# Altium PCB NEpic.PcbDoc (part 5 of 5)
Units mil, origin at the board's own origin, x right, y up, seen from the top; angles counter-clockwise.
Board outline 1660 x 1990 mil, 4 copper layers (Top Layer, GND, VCC, Bottom Layer); 30 components, 61 nets, 194 pads, 84 vias.
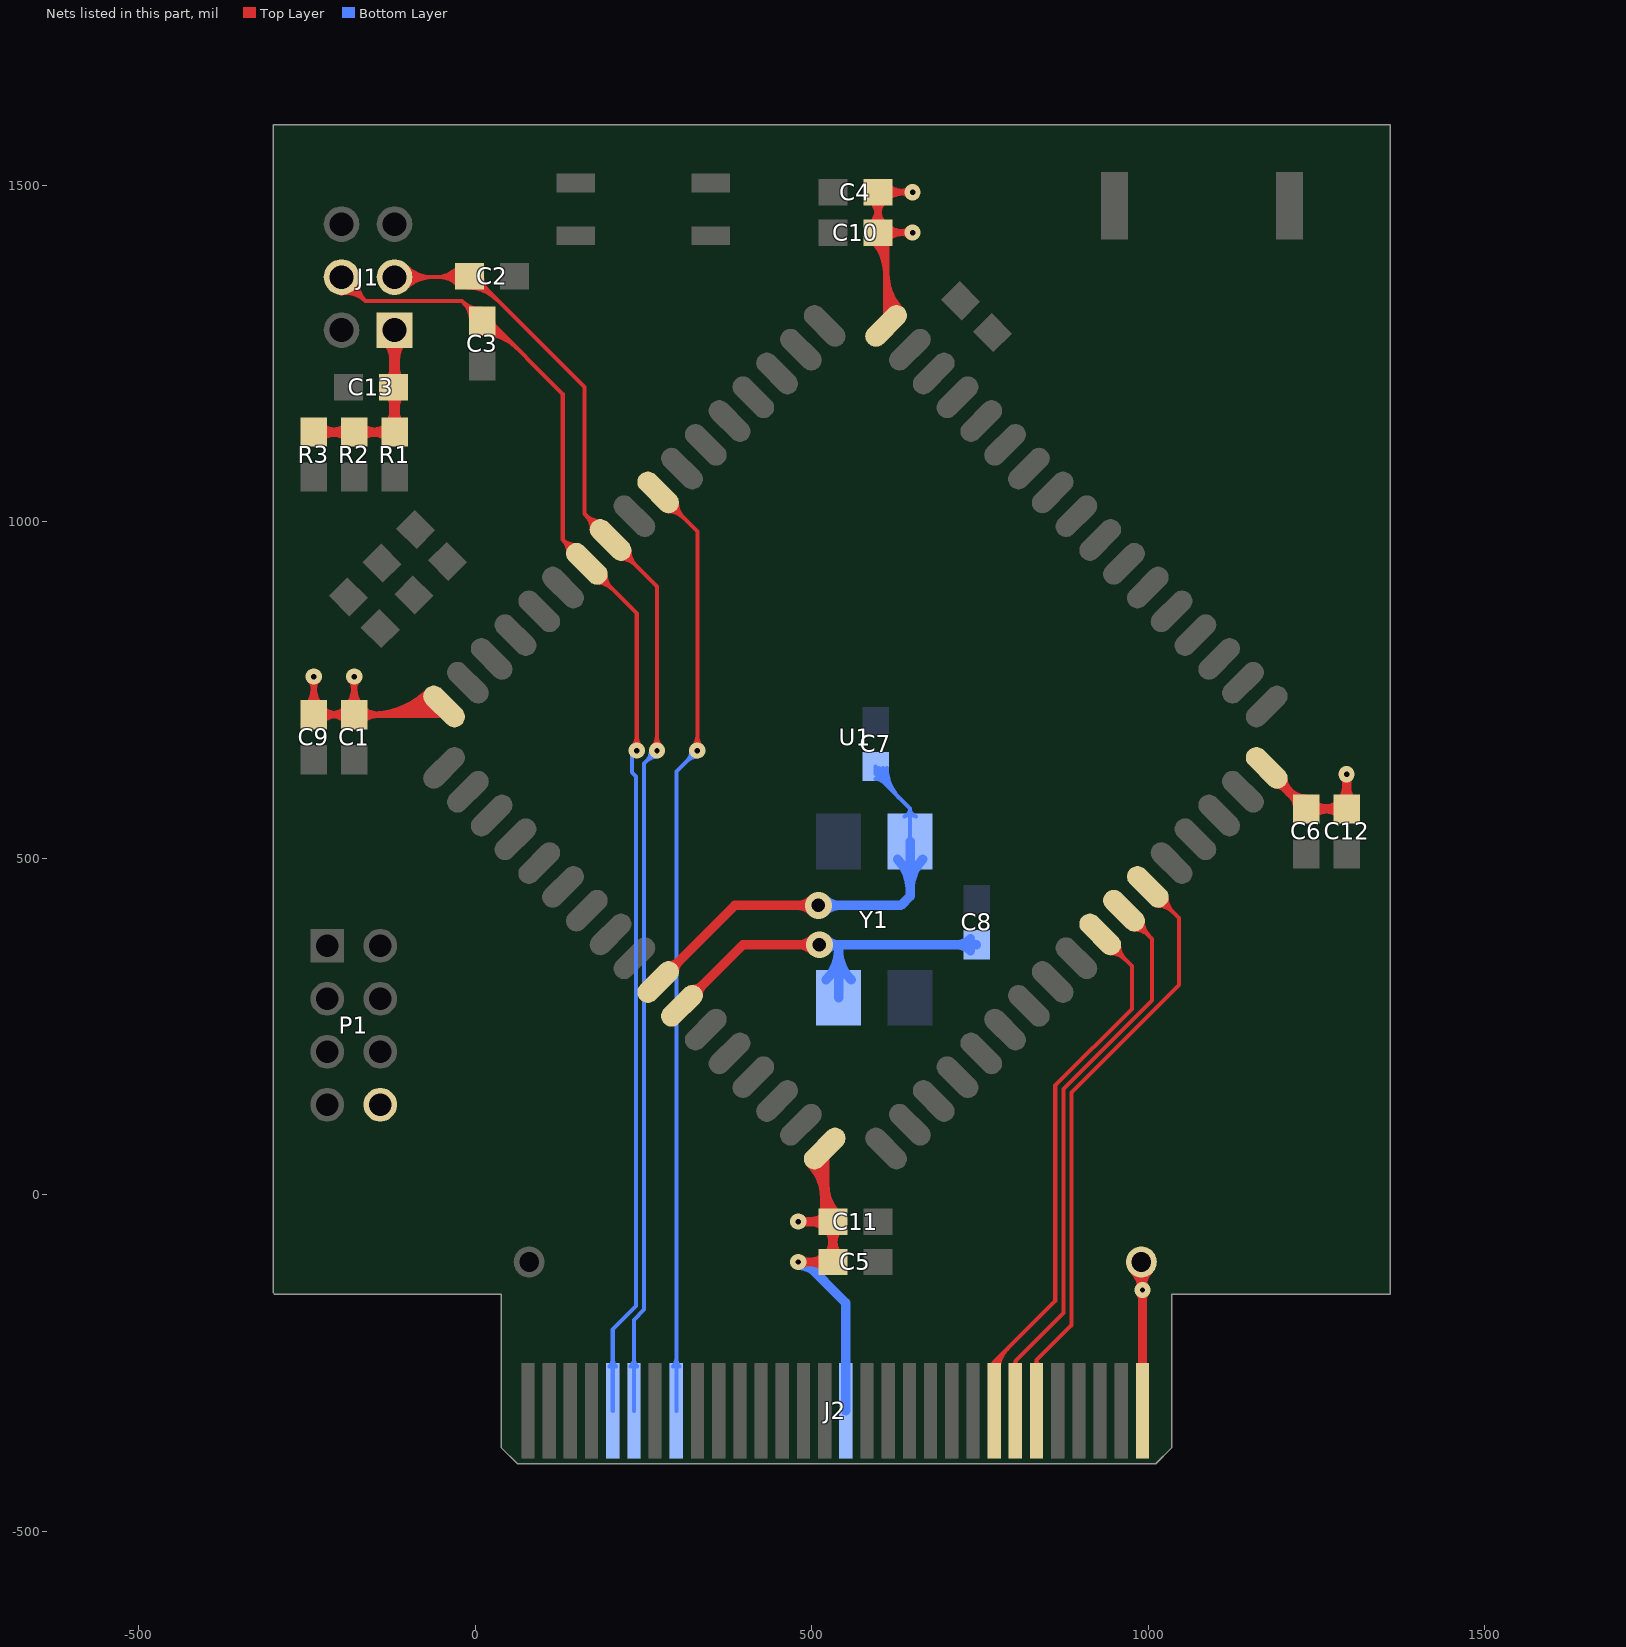
[diagram p7: the nets of this part, all layers, seen from the top]

## Via types
v1: diameter 24, hole 8, Top Layer to Bottom Layer, tented both sides, 78 vias
v2: diameter 150, hole 126, Top Layer to Bottom Layer, 4 vias
v3: diameter 40, hole 20, Top Layer to Bottom Layer, tented both sides, 2 vias

## Nets (pads, with @x,y where several pads share a name; then routed paths per layer and width w, separated by ;. In a path a pad name is that pad's centre, name@x,y a point inside that pad or via, vN(x,y) a via of type N, cw(c..) or ccw(c..) an arc to the next point about the centre after c; other vN are vias at no path point) (continued)
UART0TX: J2.45 U1.59 | length 2074.7
  Top Layer w6: U1.59@271.86,1043.85 330,985.71 v1(330,660) ; U1.59@287.17,1015.79 cw(c287.17,985.02) 308.93,1006.78 ; U1.59@287.17,1015.79 cw(c287.17,985.02) 308.93,1006.78 ; U1.59@287.17,1015.79 cw(c287.17,985.02) 308.93,1006.78 ; U1.59@287.17,1015.79 cw(c287.17,985.02) 308.93,1006.78 ; U1.59@287.17,1021.79 cw(c287.17,1005.5) 298.69,1017.02 ; U1.59@287.17,1021.79 cw(c287.17,1005.5) 298.69,1017.02 ; U1.59@287.17,1021.79 cw(c287.17,1005.5) 298.69,1017.02 ; U1.59@287.17,1021.79 cw(c287.17,1005.5) 298.69,1017.02 ; U1.59@293.92,1028.54 ccw(c310.21,1028.54) 298.69,1017.02 ; U1.59@293.92,1028.54 ccw(c310.21,1028.54) 298.69,1017.02 ; U1.59@293.92,1028.54 ccw(c310.21,1028.54) 298.69,1017.02 ; U1.59@293.92,1028.54 ccw(c310.21,1028.54) 298.69,1017.02 ; U1.59@299.92,1028.54 ccw(c330.69,1028.54) 308.93,1006.78 ; U1.59@299.92,1028.54 ccw(c330.69,1028.54) 308.93,1006.78 ; U1.59@299.92,1028.54 ccw(c330.69,1028.54) 308.93,1006.78 ; U1.59@299.92,1028.54 ccw(c330.69,1028.54) 308.93,1006.78 ; v1@323.64,666.36 ccw(c308.27,681.73) 330,681.73 ; v1@323.64,666.36 ccw(c308.27,681.73) 330,681.73 ; v1@323.64,666.36 ccw(c308.27,681.73) 330,681.73 ; v1@323.64,666.36 ccw(c308.27,681.73) 330,681.73 ; 330,681.73 ccw(c351.73,681.73) v1@336.36,666.36 ; 330,681.73 ccw(c351.73,681.73) v1@336.36,666.36 ; 330,681.73 ccw(c351.73,681.73) v1@336.36,666.36 ; 330,681.73 ccw(c351.73,681.73) v1@336.36,666.36
  Bottom Layer w6: J2.45@298.78,-321.26 298.78,628.78 v1(330,660) ; J2.45@293.94,-255.4 ccw(c282.26,-243.72) 298.78,-243.72 ; J2.45@293.94,-255.4 ccw(c282.26,-243.72) 298.78,-243.72 ; J2.45@293.94,-255.4 ccw(c282.26,-243.72) 298.78,-243.72 ; J2.45@293.94,-255.4 ccw(c282.26,-243.72) 298.78,-243.72 ; 298.78,-243.72 ccw(c315.3,-243.72) J2.45@303.62,-255.4 ; 298.78,-243.72 ccw(c315.3,-243.72) J2.45@303.62,-255.4 ; 298.78,-243.72 ccw(c315.3,-243.72) J2.45@303.62,-255.4 ; 298.78,-243.72 ccw(c315.3,-243.72) J2.45@303.62,-255.4 ; 314.64,644.64 cw(c330,629.27) v1@330,651 ; 314.64,644.64 ccw(c299.27,660) v1@321,660 ; 314.64,644.64 cw(c330,629.27) v1@330,651 ; 314.64,644.64 ccw(c299.27,660) v1@321,660 ; 314.64,644.64 cw(c330,629.27) v1@330,651 ; 314.64,644.64 ccw(c299.27,660) v1@321,660 ; 314.64,644.64 ccw(c299.27,660) v1@321,660 ; 314.64,644.64 cw(c330,629.27) v1@330,651
UART1RX: C3.2 J1.4 J2.51 U1.62 | length 4263.5
  Top Layer w6: J1.4@-198.74,1338.74 J1.4@-198.74,1363.74 -163.24,1328.24 ; J1.4@-196.47,1346.39 cw(c-192.93,1319.3) -173.62,1338.62 cw(c-154.3,1357.93) J1.4@-181.39,1361.47 ; J1.4@-195.7,1340.44 cw(c-190.94,1304.06) -165,1330 cw(c-139.06,1355.94) J1.4@-175.44,1360.7 ; v1(240,660) 240,863.58 U1.62@165.79,937.79 130,973.58 ; J1.4@-197.16,1346.31 cw(c-194.35,1315.26) -172.31,1337.31 ; J1.4@-197.16,1346.31 cw(c-194.35,1315.26) -172.31,1337.31 ; J1.4@-197.16,1346.31 cw(c-194.35,1315.26) -172.31,1337.31 ; J1.4@-196.62,1340.34 cw(c-192.85,1298.63) -163.24,1328.24 ; J1.4@-196.62,1340.34 cw(c-192.85,1298.63) -163.24,1328.24 ; J1.4@-196.62,1340.34 cw(c-192.85,1298.63) -163.24,1328.24 ; J1.4@-181.31,1362.16 ccw(c-150.26,1359.35) -172.31,1337.31 ; J1.4@-181.31,1362.16 ccw(c-150.26,1359.35) -172.31,1337.31 ; J1.4@-181.31,1362.16 ccw(c-150.26,1359.35) -172.31,1337.31 ; J1.4@-175.34,1361.62 ccw(c-133.63,1357.85) -163.24,1328.24 ; J1.4@-175.34,1361.62 ccw(c-133.63,1357.85) -163.24,1328.24 ; J1.4@-175.34,1361.62 ccw(c-133.63,1357.85) -163.24,1328.24 ; -163.24,1328.24 -134.7,1328.24 -19.78,1328.24 C3.2@10,1298.46 21.54,1298.46 130,1190 130,973.58 ; -18.79,1327.25 ccw(c6.05,1352.09) C3.2@8.73,1317.07 ; -18.79,1327.25 ccw(c6.05,1352.09) C3.2@8.73,1317.07 ; -18.79,1327.25 ccw(c6.05,1352.09) C3.2@8.73,1317.07 ; -18.79,1327.25 ccw(c6.05,1352.09) C3.2@8.73,1317.07 ; -17.09,1325.56 cw(c-42.21,1300.43) C3.2@-6.68,1300.43 ; -17.09,1325.56 cw(c-42.21,1300.43) C3.2@-6.68,1300.43 ; -17.09,1325.56 cw(c-42.21,1300.43) C3.2@-6.68,1300.43 ; -17.09,1325.56 cw(c-42.21,1300.43) C3.2@-6.68,1300.43 ; C3.2@-9.56,1318.03 ccw(c7.36,1334.95) C3.2@9.18,1311.09 ; C3.2@-9.56,1318.03 ccw(c7.36,1334.95) C3.2@9.18,1311.09 ; C3.2@-9.56,1318.03 ccw(c7.36,1334.95) C3.2@9.18,1311.09 ; C3.2@-9.56,1318.03 ccw(c7.36,1334.95) C3.2@9.18,1311.09 ; C3.2@-6.85,1315.31 cw(c-21.73,1300.43) C3.2@-0.68,1300.43 ; C3.2@-6.85,1315.31 cw(c-21.73,1300.43) C3.2@-0.68,1300.43 ; C3.2@-6.85,1315.31 cw(c-21.73,1300.43) C3.2@-0.68,1300.43 ; C3.2@-6.85,1315.31 cw(c-21.73,1300.43) C3.2@-0.68,1300.43 ; C3.2@10,1279.81 cw(c10,1206.93) 61.54,1258.46 ; C3.2@10,1279.81 cw(c10,1206.93) 61.54,1258.46 ; C3.2@10,1279.81 cw(c10,1206.93) 61.54,1258.46 ; C3.2@10,1279.81 cw(c10,1206.93) 61.54,1258.46 ; C3.2@10,1285.81 cw(c10,1227.41) 51.29,1268.71 ; C3.2@10,1285.81 cw(c10,1227.41) 51.29,1268.71 ; C3.2@10,1285.81 cw(c10,1227.41) 51.29,1268.71 ; C3.2@10,1285.81 cw(c10,1227.41) 51.29,1268.71 ; C3.2@10,1291.81 cw(c10,1247.9) 41.05,1278.95 ; C3.2@10,1291.81 cw(c10,1247.9) 41.05,1278.95 ; C3.2@10,1291.81 cw(c10,1247.9) 41.05,1278.95 ; C3.2@10,1291.81 cw(c10,1247.9) 41.05,1278.95 ; C3.2@10,1297.81 cw(c10,1268.38) 30.81,1289.19 ; C3.2@10,1297.81 cw(c10,1268.38) 30.81,1289.19 ; C3.2@10,1297.81 cw(c10,1268.38) 30.81,1289.19 ; C3.2@10,1297.81 cw(c10,1268.38) 30.81,1289.19 ; C3.2@26.69,1296.5 ccw(c34.36,1296.5) C3.2@28.93,1291.07 ; C3.2@26.69,1296.5 ccw(c34.36,1296.5) C3.2@28.93,1291.07 ; C3.2@26.69,1296.5 ccw(c34.36,1296.5) C3.2@28.93,1291.07 ; C3.2@26.69,1296.5 ccw(c34.36,1296.5) C3.2@28.93,1291.07 ; 130,973.58 cw(c111.25,954.82) U1.62@137.74,953.66 ; 130,973.58 ccw(c148.75,992.33) U1.62@149.92,965.83 ; 130,973.58 cw(c111.25,954.82) U1.62@137.74,953.66 ; 130,973.58 ccw(c148.75,992.33) U1.62@149.92,965.83 ; 130,973.58 cw(c111.25,954.82) U1.62@137.74,953.66 ; 130,973.58 ccw(c148.75,992.33) U1.62@149.92,965.83 ; 130,973.58 ccw(c148.75,992.33) U1.62@149.92,965.83 ; 130,973.58 cw(c111.25,954.82) U1.62@137.74,953.66 ; U1.62@181.1,909.73 cw(c181.1,878.95) 202.86,900.71 ; U1.62@181.1,909.73 cw(c181.1,878.95) 202.86,900.71 ; U1.62@181.1,909.73 cw(c181.1,878.95) 202.86,900.71 ; U1.62@181.1,909.73 cw(c181.1,878.95) 202.86,900.71 ; U1.62@181.1,915.73 cw(c181.1,899.44) 192.62,910.96 ; U1.62@181.1,915.73 cw(c181.1,899.44) 192.62,910.96 ; U1.62@181.1,915.73 cw(c181.1,899.44) 192.62,910.96 ; U1.62@181.1,915.73 cw(c181.1,899.44) 192.62,910.96 ; U1.62@187.85,922.48 ccw(c204.14,922.48) 192.62,910.96 ; U1.62@187.85,922.48 ccw(c204.14,922.48) 192.62,910.96 ; U1.62@187.85,922.48 ccw(c204.14,922.48) 192.62,910.96 ; U1.62@187.85,922.48 ccw(c204.14,922.48) 192.62,910.96 ; U1.62@193.85,922.48 ccw(c224.63,922.48) 202.86,900.71 ; U1.62@193.85,922.48 ccw(c224.63,922.48) 202.86,900.71 ; U1.62@193.85,922.48 ccw(c224.63,922.48) 202.86,900.71 ; U1.62@193.85,922.48 ccw(c224.63,922.48) 202.86,900.71 ; v1@233.64,666.36 ccw(c218.27,681.73) 240,681.73 ; v1@233.64,666.36 ccw(c218.27,681.73) 240,681.73 ; v1@233.64,666.36 ccw(c218.27,681.73) 240,681.73 ; v1@233.64,666.36 ccw(c218.27,681.73) 240,681.73 ; 240,681.73 ccw(c261.73,681.73) v1@246.36,666.36 ; 240,681.73 ccw(c261.73,681.73) v1@246.36,666.36 ; 240,681.73 ccw(c261.73,681.73) v1@246.36,666.36 ; 240,681.73 ccw(c261.73,681.73) v1@246.36,666.36
  Bottom Layer w6: J2.51@204.29,-321.26 204.29,-200.42 239,-165.71 239,621.91 233,627.91 233,653 v1(240,660) ; J2.51@199.45,-255.4 ccw(c187.77,-243.72) 204.29,-243.72 ; J2.51@199.45,-255.4 ccw(c187.77,-243.72) 204.29,-243.72 ; J2.51@199.45,-255.4 ccw(c187.77,-243.72) 204.29,-243.72 ; J2.51@199.45,-255.4 ccw(c187.77,-243.72) 204.29,-243.72 ; 204.29,-243.72 ccw(c220.81,-243.72) J2.51@209.13,-255.4 ; 204.29,-243.72 ccw(c220.81,-243.72) J2.51@209.13,-255.4 ; 204.29,-243.72 ccw(c220.81,-243.72) J2.51@209.13,-255.4 ; 204.29,-243.72 ccw(c220.81,-243.72) J2.51@209.13,-255.4
UART1TX: C2.2 J1.3 J2.49 U1.61 | length 4581.3
  Top Layer w6: J1.3@-120,1363.74 -1.21,1363.74 162.15,1200.38 162.15,1012.13 U1.61@201.15,973.14 270,904.29 v1(270,660) ; -53.76,1363.74 ccw(c-53.76,1408.32) C2.2@-22.23,1376.8 ; -47.67,1363.74 cw(c-47.67,1327.76) C2.2@-22.23,1353.2 ; -39.27,1363.74 ccw(c-39.27,1393.84) C2.2@-17.99,1372.56 ; -33.19,1363.74 cw(c-33.19,1342.25) C2.2@-17.99,1357.44 ; C2.2@-6.5,1348.32 cw(c-6.5,1298.31) 28.86,1333.67 ; C2.2@-6.5,1354.31 cw(c-6.5,1318.8) 18.62,1343.91 ; C2.2@10.19,1365 ccw(c40.75,1365) 19.14,1343.39 ; J1.3@-111.87,1355.61 cw(c-92.24,1335.98) -92.24,1363.74 ; J1.3@-111.87,1355.61 cw(c-92.24,1335.98) -92.24,1363.74 ; J1.3@-111.87,1355.61 cw(c-92.24,1335.98) -92.24,1363.74 ; J1.3@-111.87,1355.61 cw(c-92.24,1335.98) -92.24,1363.74 ; J1.3@-111.87,1371.87 ccw(c-92.24,1391.5) -92.24,1363.74 ; J1.3@-111.87,1371.87 ccw(c-92.24,1391.5) -92.24,1363.74 ; J1.3@-111.87,1371.87 ccw(c-92.24,1391.5) -92.24,1363.74 ; J1.3@-111.87,1371.87 ccw(c-92.24,1391.5) -92.24,1363.74 ; J1.3@-107.63,1351.37 cw(c-77.75,1321.49) -77.75,1363.74 ; J1.3@-107.63,1351.37 cw(c-77.75,1321.49) -77.75,1363.74 ; J1.3@-107.63,1351.37 cw(c-77.75,1321.49) -77.75,1363.74 ; J1.3@-107.63,1351.37 cw(c-77.75,1321.49) -77.75,1363.74 ; J1.3@-107.63,1376.11 ccw(c-77.75,1405.99) -77.75,1363.74 ; J1.3@-107.63,1376.11 ccw(c-77.75,1405.99) -77.75,1363.74 ; J1.3@-107.63,1376.11 ccw(c-77.75,1405.99) -77.75,1363.74 ; J1.3@-107.63,1376.11 ccw(c-77.75,1405.99) -77.75,1363.74 ; J1.3@-103.38,1347.12 cw(c-63.27,1307.01) -63.27,1363.74 ; J1.3@-103.38,1347.12 cw(c-63.27,1307.01) -63.27,1363.74 ; J1.3@-103.38,1347.12 cw(c-63.27,1307.01) -63.27,1363.74 ; J1.3@-103.38,1347.12 cw(c-63.27,1307.01) -63.27,1363.74 ; J1.3@-103.38,1380.36 ccw(c-63.27,1420.47) -63.27,1363.74 ; J1.3@-103.38,1380.36 ccw(c-63.27,1420.47) -63.27,1363.74 ; J1.3@-103.38,1380.36 ccw(c-63.27,1420.47) -63.27,1363.74 ; J1.3@-103.38,1380.36 ccw(c-63.27,1420.47) -63.27,1363.74 ; -58.76,1363.74 ccw(c-58.76,1408.32) C2.2@-27.23,1376.8 ; -58.76,1363.74 ccw(c-58.76,1408.32) C2.2@-27.23,1376.8 ; -58.76,1363.74 ccw(c-58.76,1408.32) C2.2@-27.23,1376.8 ; -52.67,1363.74 cw(c-52.67,1327.76) C2.2@-27.23,1353.2 ; -52.67,1363.74 cw(c-52.67,1327.76) C2.2@-27.23,1353.2 ; -52.67,1363.74 cw(c-52.67,1327.76) C2.2@-27.23,1353.2 ; -44.27,1363.74 ccw(c-44.27,1393.84) C2.2@-22.99,1372.56 ; -44.27,1363.74 ccw(c-44.27,1393.84) C2.2@-22.99,1372.56 ; -44.27,1363.74 ccw(c-44.27,1393.84) C2.2@-22.99,1372.56 ; -38.19,1363.74 cw(c-38.19,1342.25) C2.2@-22.99,1357.44 ; -38.19,1363.74 cw(c-38.19,1342.25) C2.2@-22.99,1357.44 ; -38.19,1363.74 cw(c-38.19,1342.25) C2.2@-22.99,1357.44 ; C2.2@-11.5,1348.32 cw(c-11.5,1286.24) 32.4,1330.13 ; C2.2@-11.5,1348.32 cw(c-11.5,1286.24) 32.4,1330.13 ; C2.2@-11.5,1348.32 cw(c-11.5,1286.24) 32.4,1330.13 ; C2.2@-11.5,1354.31 cw(c-11.5,1306.73) 22.15,1340.38 ; C2.2@-11.5,1354.31 cw(c-11.5,1306.73) 22.15,1340.38 ; C2.2@-11.5,1354.31 cw(c-11.5,1306.73) 22.15,1340.38 ; C2.2@-11.5,1360.31 cw(c-11.5,1327.21) C2.2@11.91,1350.62 ; C2.2@-11.5,1360.31 cw(c-11.5,1327.21) C2.2@11.91,1350.62 ; C2.2@-11.5,1360.31 cw(c-11.5,1327.21) C2.2@11.91,1350.62 ; C2.2@5.19,1365 ccw(c23.68,1365) C2.2@10.61,1351.93 ; C2.2@5.19,1365 ccw(c23.68,1365) C2.2@10.61,1351.93 ; C2.2@5.19,1365 ccw(c23.68,1365) C2.2@10.61,1351.93 ; 164.07,1010.22 cw(c142.31,988.45) U1.61@173.09,988.45 ; 164.07,1010.22 ccw(c185.83,1031.98) U1.61@185.83,1001.2 ; 164.07,1010.22 cw(c142.31,988.45) U1.61@173.09,988.45 ; 164.07,1010.22 ccw(c185.83,1031.98) U1.61@185.83,1001.2 ; 164.07,1010.22 ccw(c185.83,1031.98) U1.61@185.83,1001.2 ; 164.07,1010.22 cw(c142.31,988.45) U1.61@173.09,988.45 ; 164.07,1010.22 ccw(c185.83,1031.98) U1.61@185.83,1001.2 ; 164.07,1010.22 cw(c142.31,988.45) U1.61@173.09,988.45 ; 174.32,999.97 cw(c162.8,988.45) U1.61@179.09,988.45 ; 174.32,999.97 ccw(c185.83,1011.49) U1.61@185.83,995.2 ; 174.32,999.97 cw(c162.8,988.45) U1.61@179.09,988.45 ; 174.32,999.97 ccw(c185.83,1011.49) U1.61@185.83,995.2 ; 174.32,999.97 ccw(c185.83,1011.49) U1.61@185.83,995.2 ; 174.32,999.97 cw(c162.8,988.45) U1.61@179.09,988.45 ; 174.32,999.97 ccw(c185.83,1011.49) U1.61@185.83,995.2 ; 174.32,999.97 cw(c162.8,988.45) U1.61@179.09,988.45 ; U1.61@216.46,945.08 cw(c216.46,914.31) 238.22,936.07 ; U1.61@216.46,945.08 cw(c216.46,914.31) 238.22,936.07 ; U1.61@216.46,945.08 cw(c216.46,914.31) 238.22,936.07 ; U1.61@216.46,945.08 cw(c216.46,914.31) 238.22,936.07 ; U1.61@216.46,951.08 cw(c216.46,934.79) 227.98,946.31 ; U1.61@216.46,951.08 cw(c216.46,934.79) 227.98,946.31 ; U1.61@216.46,951.08 cw(c216.46,934.79) 227.98,946.31 ; U1.61@216.46,951.08 cw(c216.46,934.79) 227.98,946.31 ; U1.61@223.21,957.83 ccw(c239.5,957.83) 227.98,946.31 ; U1.61@223.21,957.83 ccw(c239.5,957.83) 227.98,946.31 ; U1.61@223.21,957.83 ccw(c239.5,957.83) 227.98,946.31 ; U1.61@223.21,957.83 ccw(c239.5,957.83) 227.98,946.31 ; U1.61@229.21,957.83 ccw(c259.98,957.83) 238.22,936.07 ; U1.61@229.21,957.83 ccw(c259.98,957.83) 238.22,936.07 ; U1.61@229.21,957.83 ccw(c259.98,957.83) 238.22,936.07 ; U1.61@229.21,957.83 ccw(c259.98,957.83) 238.22,936.07 ; v1@263.64,666.36 ccw(c248.27,681.73) 270,681.73 ; v1@263.64,666.36 ccw(c248.27,681.73) 270,681.73 ; v1@263.64,666.36 ccw(c248.27,681.73) 270,681.73 ; v1@263.64,666.36 ccw(c248.27,681.73) 270,681.73 ; 270,681.73 ccw(c291.73,681.73) v1@276.36,666.36 ; 270,681.73 ccw(c291.73,681.73) v1@276.36,666.36 ; 270,681.73 ccw(c291.73,681.73) v1@276.36,666.36 ; 270,681.73 ccw(c291.73,681.73) v1@276.36,666.36
  Bottom Layer w6: J2.49@235.79,-321.26 235.79,-185.9 251,-170.69 251,641 v1(270,660) ; J2.49@230.95,-255.4 ccw(c219.27,-243.72) 235.79,-243.72 ; J2.49@230.95,-255.4 ccw(c219.27,-243.72) 235.79,-243.72 ; J2.49@230.95,-255.4 ccw(c219.27,-243.72) 235.79,-243.72 ; J2.49@230.95,-255.4 ccw(c219.27,-243.72) 235.79,-243.72 ; 235.79,-243.72 ccw(c252.31,-243.72) J2.49@240.63,-255.4 ; 235.79,-243.72 ccw(c252.31,-243.72) J2.49@240.63,-255.4 ; 235.79,-243.72 ccw(c252.31,-243.72) J2.49@240.63,-255.4 ; 235.79,-243.72 ccw(c252.31,-243.72) J2.49@240.63,-255.4 ; 254.64,644.64 cw(c270,629.27) v1@270,651 ; 254.64,644.64 ccw(c239.27,660) v1@261,660 ; 254.64,644.64 cw(c270,629.27) v1@270,651 ; 254.64,644.64 ccw(c239.27,660) v1@261,660 ; 254.64,644.64 ccw(c239.27,660) v1@261,660 ; 254.64,644.64 cw(c270,629.27) v1@270,651 ; 254.64,644.64 ccw(c239.27,660) v1@261,660 ; 254.64,644.64 cw(c270,629.27) v1@270,651
VCC: C1.2 C4.2 C5.2 C6.2 C9.2 C10.2 C11.2 C12.2 C13.2 J1.1 J2.2 J2.29 P1.8 pad.0@990,-100 R1.1 R2.1 R3.1 U1.17 U1.34 U1.51 U1.68 | length 10953.3
  Top Layer w6: U1.34@1176.34,632.12 U1.34@1176.34,634.34
  Top Layer w10: v1(-240,770) C9.2@-240,713.46 -58.53,713.46 ; C1.2@-180,713.46 v1(-180,770) ; U1.68@-46.34,725.66 -58.53,713.46 ; C11.2@519.34,-27.81 C11.2@531.54,-40 ; U1.51@610.66,1291.34 610.66,1417.81 C10.2@598.46,1430 ; v1(650,1430) C10.2@598.46,1430 ; v1(650,1490) C4.2@598.46,1490 C10.2@598.46,1430 ; C9.2@-250.38,725.82 ccw(c-275.45,750.89) -240,750.89 ; C9.2@-250.38,725.82 ccw(c-275.45,750.89) -240,750.89 ; C9.2@-250.38,725.82 ccw(c-275.45,750.89) -240,750.89 ; C9.2@-250.38,725.82 ccw(c-275.45,750.89) -240,750.89 ; v1@-244.95,765.05 cw(c-256.9,753.1) -240,753.1 ; v1@-244.95,765.05 cw(c-256.9,753.1) -240,753.1 ; v1@-244.95,765.05 cw(c-256.9,753.1) -240,753.1 ; v1@-244.95,765.05 cw(c-256.9,753.1) -240,753.1 ; -240,750.89 ccw(c-204.55,750.89) C9.2@-229.62,725.82 ; -240,750.89 ccw(c-204.55,750.89) C9.2@-229.62,725.82 ; -240,750.89 ccw(c-204.55,750.89) C9.2@-229.62,725.82 ; -240,750.89 ccw(c-204.55,750.89) C9.2@-229.62,725.82 ; -240,753.1 cw(c-223.1,753.1) v1@-235.05,765.05 ; -240,753.1 cw(c-223.1,753.1) v1@-235.05,765.05 ; -240,753.1 cw(c-223.1,753.1) v1@-235.05,765.05 ; -240,753.1 cw(c-223.1,753.1) v1@-235.05,765.05 ; C9.2@-229.62,703.08 cw(c-204.55,678.01) -204.55,713.46 ; C9.2@-229.62,703.08 cw(c-204.55,678.01) -204.55,713.46 ; C9.2@-229.62,703.08 cw(c-204.55,678.01) -204.55,713.46 ; C9.2@-229.62,703.08 cw(c-204.55,678.01) -204.55,713.46 ; C9.2@-229.62,723.85 ccw(c-204.55,748.92) -204.55,713.46 ; C9.2@-229.62,723.85 ccw(c-204.55,748.92) -204.55,713.46 ; C9.2@-229.62,723.85 ccw(c-204.55,748.92) -204.55,713.46 ; C9.2@-229.62,723.85 ccw(c-204.55,748.92) -204.55,713.46 ; -215.45,713.46 cw(c-215.45,678.01) C1.2@-190.38,703.08 ; -215.45,713.46 ccw(c-215.45,748.92) C1.2@-190.38,723.85 ; -215.45,713.46 cw(c-215.45,678.01) C1.2@-190.38,703.08 ; -215.45,713.46 ccw(c-215.45,748.92) C1.2@-190.38,723.85 ; -215.45,713.46 ccw(c-215.45,748.92) C1.2@-190.38,723.85 ; -215.45,713.46 cw(c-215.45,678.01) C1.2@-190.38,703.08 ; -215.45,713.46 ccw(c-215.45,748.92) C1.2@-190.38,723.85 ; -215.45,713.46 cw(c-215.45,678.01) C1.2@-190.38,703.08 ; C1.2@-190.38,725.82 ccw(c-215.45,750.89) -180,750.89 ; C1.2@-190.38,725.82 ccw(c-215.45,750.89) -180,750.89 ; C1.2@-190.38,725.82 ccw(c-215.45,750.89) -180,750.89 ; C1.2@-190.38,725.82 ccw(c-215.45,750.89) -180,750.89 ; v1@-184.95,765.05 cw(c-196.9,753.1) -180,753.1 ; v1@-184.95,765.05 cw(c-196.9,753.1) -180,753.1 ; v1@-184.95,765.05 cw(c-196.9,753.1) -180,753.1 ; v1@-184.95,765.05 cw(c-196.9,753.1) -180,753.1 ; -180,750.89 ccw(c-144.55,750.89) C1.2@-169.62,725.82 ; -180,750.89 ccw(c-144.55,750.89) C1.2@-169.62,725.82 ; -180,750.89 ccw(c-144.55,750.89) C1.2@-169.62,725.82 ; -180,750.89 ccw(c-144.55,750.89) C1.2@-169.62,725.82 ; -180,753.1 cw(c-163.1,753.1) v1@-175.05,765.05 ; -180,753.1 cw(c-163.1,753.1) v1@-175.05,765.05 ; -180,753.1 cw(c-163.1,753.1) v1@-175.05,765.05 ; -180,753.1 cw(c-163.1,753.1) v1@-175.05,765.05 ; C1.2@-169.62,703.08 cw(c-144.55,678.01) -144.55,713.46 ; C1.2@-169.62,703.08 cw(c-144.55,678.01) -144.55,713.46 ; C1.2@-169.62,703.08 cw(c-144.55,678.01) -144.55,713.46 ; C1.2@-169.62,703.08 cw(c-144.55,678.01) -144.55,713.46 ; C1.2@-169.62,723.85 ccw(c-144.55,748.92) -144.55,713.46 ; C1.2@-169.62,723.85 ccw(c-144.55,748.92) -144.55,713.46 ; C1.2@-169.62,723.85 ccw(c-144.55,748.92) -144.55,713.46 ; C1.2@-169.62,723.85 ccw(c-144.55,748.92) -144.55,713.46 ; -154,713.46 ccw(c-154,833.31) U1.68@-69.25,748.57 ; -154,713.46 ccw(c-154,833.31) U1.68@-69.25,748.57 ; -154,713.46 ccw(c-154,833.31) U1.68@-69.25,748.57 ; -154,713.46 ccw(c-154,833.31) U1.68@-69.25,748.57 ; -129.86,713.46 ccw(c-129.86,809.17) U1.68@-62.18,741.5 ; -129.86,713.46 ccw(c-129.86,809.17) U1.68@-62.18,741.5 ; -129.86,713.46 ccw(c-129.86,809.17) U1.68@-62.18,741.5 ; -129.86,713.46 ccw(c-129.86,809.17) U1.68@-62.18,741.5 ; -105.71,713.46 ccw(c-105.71,785.03) U1.68@-55.11,734.43 ; -105.71,713.46 ccw(c-105.71,785.03) U1.68@-55.11,734.43 ; -105.71,713.46 ccw(c-105.71,785.03) U1.68@-55.11,734.43 ; -105.71,713.46 ccw(c-105.71,785.03) U1.68@-55.11,734.43 ; -81.57,713.46 ccw(c-81.57,760.89) U1.68@-48.04,727.35 ; -81.57,713.46 ccw(c-81.57,760.89) U1.68@-48.04,727.35 ; -81.57,713.46 ccw(c-81.57,760.89) U1.68@-48.04,727.35 ; -81.57,713.46 ccw(c-81.57,760.89) U1.68@-48.04,727.35 ; -58.53,713.47 cw(c-52.56,707.49) U1.68@-49.82,715.49 ; -58.53,713.47 ccw(c-64.51,719.44) U1.68@-56.51,722.18 ; -58.53,713.47 cw(c-52.56,707.49) U1.68@-49.82,715.49 ; -58.53,713.47 ccw(c-64.51,719.44) U1.68@-56.51,722.18 ; -58.53,713.47 ccw(c-64.51,719.44) U1.68@-56.51,722.18 ; -58.53,713.47 cw(c-52.56,707.49) U1.68@-49.82,715.49 ; -58.53,713.47 ccw(c-64.51,719.44) U1.68@-56.51,722.18 ; -58.53,713.47 cw(c-52.56,707.49) U1.68@-49.82,715.49 ; -57.43,713.46 ccw(c-57.43,736.74) U1.68@-40.97,720.28 ; -57.43,713.46 ccw(c-57.43,736.74) U1.68@-40.97,720.28 ; -57.43,713.46 ccw(c-57.43,736.74) U1.68@-40.97,720.28 ; -57.43,713.46 ccw(c-57.43,736.74) U1.68@-40.97,720.28 ; C10.2@588.08,1440.38 ccw(c563.01,1465.45) 598.46,1465.45 ; C10.2@588.08,1440.38 ccw(c563.01,1465.45) 598.46,1465.45 ; C10.2@588.08,1440.38 ccw(c563.01,1465.45) 598.46,1465.45 ; C10.2@588.08,1440.38 ccw(c563.01,1465.45) 598.46,1465.45 ; C4.2@588.08,1479.62 cw(c563.01,1454.55) 598.46,1454.55 ; C4.2@588.08,1479.62 cw(c563.01,1454.55) 598.46,1454.55 ; C4.2@588.08,1479.62 cw(c563.01,1454.55) 598.46,1454.55 ; C4.2@588.08,1479.62 cw(c563.01,1454.55) 598.46,1454.55 ; C10.2@590.05,1419.62 cw(c540.3,1369.87) 610.66,1369.87 ; C10.2@590.05,1419.62 cw(c540.3,1369.87) 610.66,1369.87 ; C10.2@590.05,1419.62 cw(c540.3,1369.87) 610.66,1369.87 ; C10.2@590.05,1419.62 cw(c540.3,1369.87) 610.66,1369.87 ; C10.2@597.12,1426.69 cw(c564.44,1394.01) 610.66,1394.01 ; C10.2@597.12,1426.69 cw(c564.44,1394.01) 610.66,1394.01 ; C10.2@597.12,1426.69 cw(c564.44,1394.01) 610.66,1394.01 ; C10.2@597.12,1426.69 cw(c564.44,1394.01) 610.66,1394.01 ; 598.46,1454.55 cw(c633.92,1454.55) C4.2@608.85,1479.62 ; 598.46,1454.55 cw(c633.92,1454.55) C4.2@608.85,1479.62 ; 598.46,1454.55 cw(c633.92,1454.55) C4.2@608.85,1479.62 ; 598.46,1454.55 cw(c633.92,1454.55) C4.2@608.85,1479.62 ; 598.46,1465.45 ccw(c633.92,1465.45) C10.2@608.85,1440.38 ; 598.46,1465.45 ccw(c633.92,1465.45) C10.2@608.85,1440.38 ; 598.46,1465.45 ccw(c633.92,1465.45) C10.2@608.85,1440.38 ; 598.46,1465.45 ccw(c633.92,1465.45) C10.2@608.85,1440.38 ; U1.51@610.66,1297.14 ccw(c616.45,1297.14) U1.51@612.35,1293.04 ; U1.51@610.66,1297.14 ccw(c616.45,1297.14) U1.51@612.35,1293.04 ; U1.51@610.66,1297.14 ccw(c616.45,1297.14) U1.51@612.35,1293.04 ; U1.51@610.66,1297.14 ccw(c616.45,1297.14) U1.51@612.35,1293.04 ; 610.66,1321.28 ccw(c640.6,1321.28) U1.51@619.43,1300.11 ; 610.66,1321.28 ccw(c640.6,1321.28) U1.51@619.43,1300.11 ; 610.66,1321.28 ccw(c640.6,1321.28) U1.51@619.43,1300.11 ; 610.66,1321.28 ccw(c640.6,1321.28) U1.51@619.43,1300.11 ; 610.66,1345.42 ccw(c664.74,1345.42) U1.51@626.5,1307.18 ; 610.66,1345.42 ccw(c664.74,1345.42) U1.51@626.5,1307.18 ; 610.66,1345.42 ccw(c664.74,1345.42) U1.51@626.5,1307.18 ; 610.66,1345.42 ccw(c664.74,1345.42) U1.51@626.5,1307.18 ; 610.66,1369.57 ccw(c688.88,1369.57) U1.51@633.57,1314.25 ; 610.66,1369.57 ccw(c688.88,1369.57) U1.51@633.57,1314.25 ; 610.66,1369.57 ccw(c688.88,1369.57) U1.51@633.57,1314.25 ; 610.66,1369.57 ccw(c688.88,1369.57) U1.51@633.57,1314.25 ; C10.2@610.82,1419.62 cw(c635.89,1394.55) 635.89,1430 ; C10.2@610.82,1419.62 cw(c635.89,1394.55) 635.89,1430 ; C10.2@610.82,1419.62 cw(c635.89,1394.55) 635.89,1430 ; C10.2@610.82,1419.62 cw(c635.89,1394.55) 635.89,1430 ; C10.2@610.82,1440.38 ccw(c635.89,1465.45) 635.89,1430 ; C10.2@610.82,1440.38 ccw(c635.89,1465.45) 635.89,1430 ; C10.2@610.82,1440.38 ccw(c635.89,1465.45) 635.89,1430 ; C10.2@610.82,1440.38 ccw(c635.89,1465.45) 635.89,1430 ; C4.2@610.82,1479.62 cw(c635.89,1454.55) 635.89,1490 ; C4.2@610.82,1479.62 cw(c635.89,1454.55) 635.89,1490 ; C4.2@610.82,1479.62 cw(c635.89,1454.55) 635.89,1490 ; C4.2@610.82,1479.62 cw(c635.89,1454.55) 635.89,1490 ; C4.2@610.82,1500.38 ccw(c635.89,1525.45) 635.89,1490 ; C4.2@610.82,1500.38 ccw(c635.89,1525.45) 635.89,1490 ; C4.2@610.82,1500.38 ccw(c635.89,1525.45) 635.89,1490 ; C4.2@610.82,1500.38 ccw(c635.89,1525.45) 635.89,1490 ; 633.1,1430 cw(c633.1,1413.1) v1@645.05,1425.05 ; 633.1,1430 ccw(c633.1,1446.9) v1@645.05,1434.95 ; 633.1,1430 cw(c633.1,1413.1) v1@645.05,1425.05 ; 633.1,1430 ccw(c633.1,1446.9) v1@645.05,1434.95 ; 633.1,1430 ccw(c633.1,1446.9) v1@645.05,1434.95 ; 633.1,1430 cw(c633.1,1413.1) v1@645.05,1425.05 ; 633.1,1430 ccw(c633.1,1446.9) v1@645.05,1434.95 ; 633.1,1430 cw(c633.1,1413.1) v1@645.05,1425.05 ; 633.1,1490 cw(c633.1,1473.1) v1@645.05,1485.05 ; 633.1,1490 ccw(c633.1,1506.9) v1@645.05,1494.95 ; 633.1,1490 cw(c633.1,1473.1) v1@645.05,1485.05 ; 633.1,1490 ccw(c633.1,1506.9) v1@645.05,1494.95 ; 633.1,1490 ccw(c633.1,1506.9) v1@645.05,1494.95 ; 633.1,1490 cw(c633.1,1473.1) v1@645.05,1485.05 ; 633.1,1490 ccw(c633.1,1506.9) v1@645.05,1494.95 ; 633.1,1490 cw(c633.1,1473.1) v1@645.05,1485.05
  Top Layer w14: R3.1@-240,1133.46 R2.1@-180,1133.46 R1.1@-120,1133.46 ; v1(480,-100) C5.2@531.54,-100 C11.2@531.54,-40 v1(480,-40) ; C11.2@519.34,-27.81 U1.17@519.34,68.66 ; J2.2@991.69,-321.26 pad.0@991.69,-100 ; U1.34@1176.34,632.12 C6.2@1235,573.46 C12.2@1295,573.46 v1(1295,625) ; R3.1@-231.03,1124.49 cw(c-209.38,1102.84) -209.38,1133.46 ; R3.1@-231.03,1124.49 cw(c-209.38,1102.84) -209.38,1133.46 ; R3.1@-231.03,1124.49 cw(c-209.38,1102.84) -209.38,1133.46 ; R3.1@-231.03,1124.49 cw(c-209.38,1102.84) -209.38,1133.46 ; R3.1@-231.03,1142.43 ccw(c-209.38,1164.09) -209.38,1133.46 ; R3.1@-231.03,1142.43 ccw(c-209.38,1164.09) -209.38,1133.46 ; R3.1@-231.03,1142.43 ccw(c-209.38,1164.09) -209.38,1133.46 ; R3.1@-231.03,1142.43 ccw(c-209.38,1164.09) -209.38,1133.46 ; -210.62,1133.46 cw(c-210.62,1102.84) R2.1@-188.97,1124.49 ; -210.62,1133.46 ccw(c-210.62,1164.09) R2.1@-188.97,1142.43 ; -210.62,1133.46 cw(c-210.62,1102.84) R2.1@-188.97,1124.49 ; -210.62,1133.46 ccw(c-210.62,1164.09) R2.1@-188.97,1142.43 ; -210.62,1133.46 ccw(c-210.62,1164.09) R2.1@-188.97,1142.43 ; -210.62,1133.46 cw(c-210.62,1102.84) R2.1@-188.97,1124.49 ; -210.62,1133.46 ccw(c-210.62,1164.09) R2.1@-188.97,1142.43 ; -210.62,1133.46 cw(c-210.62,1102.84) R2.1@-188.97,1124.49 ; R2.1@-171.03,1124.49 cw(c-149.38,1102.84) -149.38,1133.46 ; R2.1@-171.03,1124.49 cw(c-149.38,1102.84) -149.38,1133.46 ; R2.1@-171.03,1124.49 cw(c-149.38,1102.84) -149.38,1133.46 ; R2.1@-171.03,1124.49 cw(c-149.38,1102.84) -149.38,1133.46 ; R2.1@-171.03,1142.43 ccw(c-149.38,1164.09) -149.38,1133.46 ; R2.1@-171.03,1142.43 ccw(c-149.38,1164.09) -149.38,1133.46 ; R2.1@-171.03,1142.43 ccw(c-149.38,1164.09) -149.38,1133.46 ; R2.1@-171.03,1142.43 ccw(c-149.38,1164.09) -149.38,1133.46 ; -150.62,1133.46 cw(c-150.62,1102.84) R1.1@-128.97,1124.49 ; -150.62,1133.46 ccw(c-150.62,1164.09) R1.1@-128.97,1142.43 ; -150.62,1133.46 cw(c-150.62,1102.84) R1.1@-128.97,1124.49 ; -150.62,1133.46 ccw(c-150.62,1164.09) R1.1@-128.97,1142.43 ; -150.62,1133.46 ccw(c-150.62,1164.09) R1.1@-128.97,1142.43 ; -150.62,1133.46 cw(c-150.62,1102.84) R1.1@-128.97,1124.49 ; -150.62,1133.46 ccw(c-150.62,1164.09) R1.1@-128.97,1142.43 ; -150.62,1133.46 cw(c-150.62,1102.84) R1.1@-128.97,1124.49 ; v1@483.54,-103.54 cw(c492.07,-112.07) 492.07,-100 ; v1@483.54,-103.54 cw(c492.07,-112.07) 492.07,-100 ; v1@483.54,-103.54 cw(c492.07,-112.07) 492.07,-100 ; v1@483.54,-103.54 cw(c492.07,-112.07) 492.07,-100 ; v1@483.54,-96.46 ccw(c492.07,-87.93) 492.07,-100 ; v1@483.54,-96.46 ccw(c492.07,-87.93) 492.07,-100 ; v1@483.54,-96.46 ccw(c492.07,-87.93) 492.07,-100 ; v1@483.54,-96.46 ccw(c492.07,-87.93) 492.07,-100 ; v1@483.54,-43.54 cw(c492.07,-52.07) 492.07,-40 ; v1@483.54,-43.54 cw(c492.07,-52.07) 492.07,-40 ; v1@483.54,-43.54 cw(c492.07,-52.07) 492.07,-40 ; v1@483.54,-43.54 cw(c492.07,-52.07) 492.07,-40 ; v1@483.54,-36.46 ccw(c492.07,-27.93) 492.07,-40 ; v1@483.54,-36.46 ccw(c492.07,-27.93) 492.07,-40 ; v1@483.54,-36.46 ccw(c492.07,-27.93) 492.07,-40 ; v1@483.54,-36.46 ccw(c492.07,-27.93) 492.07,-40 ; U1.17@497.85,47.16 cw(c445.95,-4.74) 519.34,-4.74 ; U1.17@497.85,47.16 cw(c445.95,-4.74) 519.34,-4.74 ; U1.17@497.85,47.16 cw(c445.95,-4.74) 519.34,-4.74 ; U1.17@497.85,47.16 cw(c445.95,-4.74) 519.34,-4.74 ; 498.94,-100 cw(c498.94,-130.62) C5.2@520.6,-108.97 ; 498.94,-100 ccw(c498.94,-69.38) C5.2@520.6,-91.03 ; 498.94,-100 cw(c498.94,-130.62) C5.2@520.6,-108.97 ; 498.94,-100 ccw(c498.94,-69.38) C5.2@520.6,-91.03 ; 498.94,-100 ccw(c498.94,-69.38) C5.2@520.6,-91.03 ; 498.94,-100 cw(c498.94,-130.62) C5.2@520.6,-108.97 ; 498.94,-100 ccw(c498.94,-69.38) C5.2@520.6,-91.03 ; 498.94,-100 cw(c498.94,-130.62) C5.2@520.6,-108.97 ; 498.94,-40 cw(c498.94,-70.62) C11.2@520.6,-48.97 ; 498.94,-40 ccw(c498.94,-9.38) C11.2@520.6,-31.03 ; 498.94,-40 cw(c498.94,-70.62) C11.2@520.6,-48.97 ; 498.94,-40 ccw(c498.94,-9.38) C11.2@520.6,-31.03 ; 498.94,-40 ccw(c498.94,-9.38) C11.2@520.6,-31.03 ; 498.94,-40 cw(c498.94,-70.62) C11.2@520.6,-48.97 ; 498.94,-40 ccw(c498.94,-9.38) C11.2@520.6,-31.03 ; 498.94,-40 cw(c498.94,-70.62) C11.2@520.6,-48.97 ; U1.17@507.75,57.06 cw(c479.75,29.06) 519.34,29.06 ; U1.17@507.75,57.06 cw(c479.75,29.06) 519.34,29.06 ; U1.17@507.75,57.06 cw(c479.75,29.06) 519.34,29.06 ; U1.17@507.75,57.06 cw(c479.75,29.06) 519.34,29.06 ; U1.17@517.65,66.96 cw(c513.55,62.86) U1.17@519.34,62.86 ; U1.17@517.65,66.96 cw(c513.55,62.86) U1.17@519.34,62.86 ; U1.17@517.65,66.96 cw(c513.55,62.86) U1.17@519.34,62.86 ; U1.17@517.65,66.96 cw(c513.55,62.86) U1.17@519.34,62.86 ; 519.34,-18.49 ccw(c551.07,-18.49) C11.2@528.64,-40.93 ; 519.34,-18.49 ccw(c551.07,-18.49) C11.2@528.64,-40.93 ; 519.34,-18.49 ccw(c551.07,-18.49) C11.2@528.64,-40.93 ; 519.34,-18.49 ccw(c551.07,-18.49) C11.2@528.64,-40.93 ; 519.34,15.3 ccw(c584.87,15.3) C11.2@538.54,-31.03 ; 519.34,15.3 ccw(c584.87,15.3) C11.2@538.54,-31.03 ; 519.34,15.3 ccw(c584.87,15.3) C11.2@538.54,-31.03 ; 519.34,15.3 ccw(c584.87,15.3) C11.2@538.54,-31.03 ; C5.2@522.57,-91.03 ccw(c500.91,-69.38) 531.54,-69.38 ; C5.2@522.57,-91.03 ccw(c500.91,-69.38) 531.54,-69.38 ; C5.2@522.57,-91.03 ccw(c500.91,-69.38) 531.54,-69.38 ; C5.2@522.57,-91.03 ccw(c500.91,-69.38) 531.54,-69.38 ; C11.2@522.57,-48.97 cw(c500.91,-70.63) 531.54,-70.63 ; C11.2@522.57,-48.97 cw(c500.91,-70.63) 531.54,-70.63 ; C11.2@522.57,-48.97 cw(c500.91,-70.63) 531.54,-70.63 ; C11.2@522.57,-48.97 cw(c500.91,-70.63) 531.54,-70.63 ; 531.54,-70.62 cw(c562.16,-70.62) C11.2@540.51,-48.97 ; 531.54,-70.62 cw(c562.16,-70.62) C11.2@540.51,-48.97 ; 531.54,-70.62 cw(c562.16,-70.62) C11.2@540.51,-48.97 ; 531.54,-70.62 cw(c562.16,-70.62) C11.2@540.51,-48.97 ; 531.54,-69.38 ccw(c562.16,-69.38) C5.2@540.51,-91.03 ; 531.54,-69.38 ccw(c562.16,-69.38) C5.2@540.51,-91.03 ; 531.54,-69.38 ccw(c562.16,-69.38) C5.2@540.51,-91.03 ; 531.54,-69.38 ccw(c562.16,-69.38) C5.2@540.51,-91.03 ; pad.0@978.69,-111.31 cw(c947.29,-142.71) v1@991.69,-142.71 ; pad.0@978.69,-111.31 cw(c947.29,-142.71) v1@991.69,-142.71 ; pad.0@978.69,-111.31 cw(c947.29,-142.71) v1@991.69,-142.71 ; v1@988.16,-145.23 cw(c979.62,-153.76) 991.69,-153.76 ; v1@988.16,-145.23 cw(c979.62,-153.76) 991.69,-153.76 ; v1@988.16,-145.23 cw(c979.62,-153.76) 991.69,-153.76 ; v1@988.16,-145.23 cw(c979.62,-153.76) 991.69,-153.76 ; v1@988.16,-138.16 ccw(c979.62,-129.62) 991.69,-129.62 ; v1@988.16,-138.16 ccw(c979.62,-129.62) 991.69,-129.62 ; v1@988.16,-138.16 ccw(c979.62,-129.62) 991.69,-129.62 ; 991.69,-153.76 cw(c1003.76,-153.76) v1@995.23,-145.23 ; 991.69,-153.76 cw(c1003.76,-153.76) v1@995.23,-145.23 ; 991.69,-153.76 cw(c1003.76,-153.76) v1@995.23,-145.23 ; 991.69,-153.76 cw(c1003.76,-153.76) v1@995.23,-145.23 ; v1@991.69,-134.54 cw(c1024.54,-134.54) pad.0@1001.31,-111.31 ; v1@991.69,-134.54 cw(c1024.54,-134.54) pad.0@1001.31,-111.31 ; v1@991.69,-134.54 cw(c1024.54,-134.54) pad.0@1001.31,-111.31 ; 991.69,-129.62 ccw(c1003.76,-129.62) v1@995.23,-138.16 ; 991.69,-129.62 ccw(c1003.76,-129.62) v1@995.23,-138.16 ; 991.69,-129.62 ccw(c1003.76,-129.62) v1@995.23,-138.16 ; U1.34@1191.65,610.28 cw(c1191.65,594.53) 1202.79,605.67 ; U1.34@1191.65,610.28 cw(c1191.65,594.53) 1202.79,605.67 ; U1.34@1191.65,610.28 cw(c1191.65,594.53) 1202.79,605.67 ; U1.34@1191.65,610.28 cw(c1191.65,594.53) 1202.79,605.67 ; U1.34@1200.4,619.03 ccw(c1226.88,619.03) 1208.16,600.31 ; U1.34@1200.4,619.03 ccw(c1226.88,619.03) 1208.16,600.31 ; U1.34@1200.4,619.03 ccw(c1226.88,619.03) 1208.16,600.31 ; U1.34@1200.4,619.03 ccw(c1226.88,619.03) 1208.16,600.31 ; 1209.98,598.48 ccw(c1235,623.49) C6.2@1235,588.12 ; 1209.98,598.48 ccw(c1235,623.49) C6.2@1235,588.12 ; 1209.98,598.48 ccw(c1235,623.49) C6.2@1235,588.12 ; 1209.98,598.48 ccw(c1235,623.49) C6.2@1235,588.12 ; 1214.74,593.73 cw(c1196.44,575.43) C6.2@1222.32,575.43 ; 1214.74,593.73 cw(c1196.44,575.43) C6.2@1222.32,575.43 ; 1214.74,593.73 cw(c1196.44,575.43) C6.2@1222.32,575.43 ; 1214.74,593.73 cw(c1196.44,575.43) C6.2@1222.32,575.43 ; C6.2@1243.97,564.49 cw(c1265.62,542.84) 1265.62,573.46 ; C6.2@1243.97,564.49 cw(c1265.62,542.84) 1265.62,573.46 ; C6.2@1243.97,564.49 cw(c1265.62,542.84) 1265.62,573.46 ; C6.2@1243.97,564.49 cw(c1265.62,542.84) 1265.62,573.46 ; C6.2@1243.97,582.43 ccw(c1265.62,604.09) 1265.62,573.46 ; C6.2@1243.97,582.43 ccw(c1265.62,604.09) 1265.62,573.46 ; C6.2@1243.97,582.43 ccw(c1265.62,604.09) 1265.62,573.46 ; C6.2@1243.97,582.43 ccw(c1265.62,604.09) 1265.62,573.46 ; 1264.38,573.46 cw(c1264.38,542.84) C12.2@1286.03,564.49 ; 1264.38,573.46 ccw(c1264.38,604.09) C12.2@1286.03,582.43 ; 1264.38,573.46 cw(c1264.38,542.84) C12.2@1286.03,564.49 ; 1264.38,573.46 ccw(c1264.38,604.09) C12.2@1286.03,582.43 ; 1264.38,573.46 ccw(c1264.38,604.09) C12.2@1286.03,582.43 ; 1264.38,573.46 cw(c1264.38,542.84) C12.2@1286.03,564.49 ; 1264.38,573.46 ccw(c1264.38,604.09) C12.2@1286.03,582.43 ; 1264.38,573.46 cw(c1264.38,542.84) C12.2@1286.03,564.49 ; C12.2@1286.03,584.4 ccw(c1264.38,606.06) 1295,606.06 ; C12.2@1286.03,584.4 ccw(c1264.38,606.06) 1295,606.06 ; C12.2@1286.03,584.4 ccw(c1264.38,606.06) 1295,606.06 ; C12.2@1286.03,584.4 ccw(c1264.38,606.06) 1295,606.06 ; v1@1291.46,621.46 cw(c1282.93,612.93) 1295,612.93 ; v1@1291.46,621.46 cw(c1282.93,612.93) 1295,612.93 ; v1@1291.46,621.46 cw(c1282.93,612.93) 1295,612.93 ; v1@1291.46,621.46 cw(c1282.93,612.93) 1295,612.93 ; 1295,606.06 ccw(c1325.62,606.06) C12.2@1303.97,584.4 ; 1295,606.06 ccw(c1325.62,606.06) C12.2@1303.97,584.4 ; 1295,606.06 ccw(c1325.62,606.06) C12.2@1303.97,584.4 ; 1295,606.06 ccw(c1325.62,606.06) C12.2@1303.97,584.4 ; 1295,612.93 cw(c1307.07,612.93) v1@1298.54,621.46 ; 1295,612.93 cw(c1307.07,612.93) v1@1298.54,621.46 ; 1295,612.93 cw(c1307.07,612.93) v1@1298.54,621.46 ; 1295,612.93 cw(c1307.07,612.93) v1@1298.54,621.46
  Top Layer w16: R1.1@-120,1133.46 J1.1@-120,1285 ; J1.1@-133.08,1271.92 cw(c-164.66,1240.34) -120,1240.34 ; J1.1@-133.08,1271.92 cw(c-164.66,1240.34) -120,1240.34 ; J1.1@-133.08,1271.92 cw(c-164.66,1240.34) -120,1240.34 ; J1.1@-133.08,1271.92 cw(c-164.66,1240.34) -120,1240.34 ; R1.1@-128.26,1143.7 ccw(c-148.21,1163.64) -120,1163.64 ; R1.1@-128.26,1143.7 ccw(c-148.21,1163.64) -120,1163.64 ; R1.1@-128.26,1143.7 ccw(c-148.21,1163.64) -120,1163.64 ; R1.1@-128.26,1143.7 ccw(c-148.21,1163.64) -120,1163.64 ; C13.2@-127.83,1191.74 cw(c-146.73,1172.84) -120,1172.84 ; C13.2@-127.83,1191.74 cw(c-146.73,1172.84) -120,1172.84 ; C13.2@-127.83,1191.74 cw(c-146.73,1172.84) -120,1172.84 ; C13.2@-127.83,1191.74 cw(c-146.73,1172.84) -120,1172.84 ; C13.2@-127.83,1208.26 ccw(c-146.73,1227.16) -120,1227.16 ; C13.2@-127.83,1208.26 ccw(c-146.73,1227.16) -120,1227.16 ; C13.2@-127.83,1208.26 ccw(c-146.73,1227.16) -120,1227.16 ; C13.2@-127.83,1208.26 ccw(c-146.73,1227.16) -120,1227.16 ; -120,1163.64 ccw(c-91.79,1163.64) R1.1@-111.74,1143.7 ; -120,1163.64 ccw(c-91.79,1163.64) R1.1@-111.74,1143.7 ; -120,1163.64 ccw(c-91.79,1163.64) R1.1@-111.74,1143.7 ; -120,1163.64 ccw(c-91.79,1163.64) R1.1@-111.74,1143.7 ; -120,1170.74 cw(c-90.31,1170.74) C13.2@-111.3,1191.74 ; -120,1170.74 cw(c-90.31,1170.74) C13.2@-111.3,1191.74 ; -120,1170.74 cw(c-90.31,1170.74) C13.2@-111.3,1191.74 ; -120,1170.74 cw(c-90.31,1170.74) C13.2@-111.3,1191.74 ; -120,1229.26 ccw(c-90.31,1229.26) C13.2@-111.3,1208.26 ; -120,1229.26 ccw(c-90.31,1229.26) C13.2@-111.3,1208.26 ; -120,1229.26 ccw(c-90.31,1229.26) C13.2@-111.3,1208.26 ; -120,1229.26 ccw(c-90.31,1229.26) C13.2@-111.3,1208.26 ; -120,1240.34 cw(c-75.34,1240.34) J1.1@-106.92,1271.92 ; -120,1240.34 cw(c-75.34,1240.34) J1.1@-106.92,1271.92 ; -120,1240.34 cw(c-75.34,1240.34) J1.1@-106.92,1271.92 ; -120,1240.34 cw(c-75.34,1240.34) J1.1@-106.92,1271.92
  Bottom Layer w14: v1(480,-100) 490,-100 550.75,-160.75 J2.29@550.75,-321.26 ; v1@480,-105 cw(c480,-141.21) 505.61,-115.61 ; v1@480,-105 cw(c480,-141.21) 505.61,-115.61 ; v1@480,-105 cw(c480,-141.21) 505.61,-115.61 ; v1@480,-105 cw(c480,-141.21) 505.61,-115.61
  other v1: 991.69,-141.69
VEREF+: J2.14 U1.28 | length 1209.4
  Top Layer w6: J2.14@802.72,-321.26 802.72,-247.28 ; U1.28@964.21,422.21 1006,380.42 1006,289.03 874,157.03 874,-176 802.72,-247.28 ; J2.14@798.86,-254.58 ccw(c793.88,-247.28) 802.72,-247.28 ; J2.14@798.86,-254.58 ccw(c793.88,-247.28) 802.72,-247.28 ; J2.14@798.86,-254.58 ccw(c793.88,-247.28) 802.72,-247.28 ; J2.14@798.86,-254.58 ccw(c793.88,-247.28) 802.72,-247.28 ; 802.72,-247.28 ccw(c811.55,-247.28) J2.14@806.57,-254.58 ; 802.72,-247.28 ccw(c811.55,-247.28) J2.14@806.57,-254.58 ; 802.72,-247.28 ccw(c811.55,-247.28) J2.14@806.57,-254.58 ; 802.72,-247.28 ccw(c811.55,-247.28) J2.14@806.57,-254.58 ; U1.28@979.52,394.15 cw(c979.52,363.38) 1001.28,385.14 ; U1.28@979.52,394.15 cw(c979.52,363.38) 1001.28,385.14 ; U1.28@979.52,394.15 cw(c979.52,363.38) 1001.28,385.14 ; U1.28@979.52,394.15 cw(c979.52,363.38) 1001.28,385.14 ; U1.28@979.52,400.15 cw(c979.52,383.86) 991.04,395.38 ; U1.28@979.52,400.15 cw(c979.52,383.86) 991.04,395.38 ; U1.28@979.52,400.15 cw(c979.52,383.86) 991.04,395.38 ; U1.28@979.52,400.15 cw(c979.52,383.86) 991.04,395.38 ; U1.28@986.27,406.9 ccw(c1002.56,406.9) 991.04,395.38 ; U1.28@986.27,406.9 ccw(c1002.56,406.9) 991.04,395.38 ; U1.28@986.27,406.9 ccw(c1002.56,406.9) 991.04,395.38 ; U1.28@986.27,406.9 ccw(c1002.56,406.9) 991.04,395.38 ; U1.28@992.27,406.9 ccw(c1023.05,406.9) 1001.28,385.14 ; U1.28@992.27,406.9 ccw(c1023.05,406.9) 1001.28,385.14 ; U1.28@992.27,406.9 ccw(c1023.05,406.9) 1001.28,385.14 ; U1.28@992.27,406.9 ccw(c1023.05,406.9) 1001.28,385.14
VREF+: J2.16 U1.27 | length 1441.2
  Top Layer w6: J2.16@771.22,-321.26 771.22,-248.78 ; U1.27@928.85,386.86 976,339.71 976,276 862,162 862,-158 771.22,-248.78 ; J2.16@766.06,-260.24 cw(c781.27,-260.24) 770.52,-249.48 ; J2.16@766.06,-260.24 cw(c781.27,-260.24) 770.52,-249.48 ; J2.16@766.06,-260.24 cw(c781.27,-260.24) 770.52,-249.48 ; J2.16@766.06,-260.24 cw(c781.27,-260.24) 770.52,-249.48 ; J2.16@767.98,-254.21 ccw(c765.05,-248.78) 771.22,-248.78 ; J2.16@767.98,-254.21 ccw(c765.05,-248.78) 771.22,-248.78 ; J2.16@767.98,-254.21 ccw(c765.05,-248.78) 771.22,-248.78 ; J2.16@767.98,-254.21 ccw(c765.05,-248.78) 771.22,-248.78 ; 771.22,-248.78 ccw(c777.39,-248.78) J2.16@774.46,-254.21 ; 771.22,-248.78 ccw(c777.39,-248.78) J2.16@774.46,-254.21 ; 771.22,-248.78 ccw(c777.39,-248.78) J2.16@774.46,-254.21 ; 771.22,-248.78 ccw(c777.39,-248.78) J2.16@774.46,-254.21 ; J2.16@772.06,-260.24 cw(c801.76,-260.24) 780.76,-239.24 ; J2.16@772.06,-260.24 cw(c801.76,-260.24) 780.76,-239.24 ; J2.16@772.06,-260.24 cw(c801.76,-260.24) 780.76,-239.24 ; J2.16@772.06,-260.24 cw(c801.76,-260.24) 780.76,-239.24 ; J2.16@778.06,-260.24 cw(c822.24,-260.24) 791,-229 ; J2.16@778.06,-260.24 cw(c822.24,-260.24) 791,-229 ; J2.16@778.06,-260.24 cw(c822.24,-260.24) 791,-229 ; J2.16@778.06,-260.24 cw(c822.24,-260.24) 791,-229 ; U1.27@944.17,358.8 cw(c944.17,328.02) 965.93,349.78 ; U1.27@944.17,358.8 cw(c944.17,328.02) 965.93,349.78 ; U1.27@944.17,358.8 cw(c944.17,328.02) 965.93,349.78 ; U1.27@944.17,358.8 cw(c944.17,328.02) 965.93,349.78 ; U1.27@944.17,364.8 cw(c944.17,348.51) 955.68,360.03 ; U1.27@944.17,364.8 cw(c944.17,348.51) 955.68,360.03 ; U1.27@944.17,364.8 cw(c944.17,348.51) 955.68,360.03 ; U1.27@944.17,364.8 cw(c944.17,348.51) 955.68,360.03 ; U1.27@950.91,371.54 ccw(c967.2,371.54) 955.68,360.03 ; U1.27@950.91,371.54 ccw(c967.2,371.54) 955.68,360.03 ; U1.27@950.91,371.54 ccw(c967.2,371.54) 955.68,360.03 ; U1.27@950.91,371.54 ccw(c967.2,371.54) 955.68,360.03 ; U1.27@956.91,371.54 ccw(c987.69,371.54) 965.93,349.78 ; U1.27@956.91,371.54 ccw(c987.69,371.54) 965.93,349.78 ; U1.27@956.91,371.54 ccw(c987.69,371.54) 965.93,349.78 ; U1.27@956.91,371.54 ccw(c987.69,371.54) 965.93,349.78
VREF-: J2.12 U1.29 | length 1265.3
  Top Layer w6: J2.12@834.21,-321.26 834.21,-245.79 ; U1.29@999.56,457.57 1046,411.13 1046,312.06 886,152.06 886,-194 834.21,-245.79 ; J2.12@829.88,-254.94 ccw(c822.38,-245.79) 834.21,-245.79 ; J2.12@829.88,-254.94 ccw(c822.38,-245.79) 834.21,-245.79 ; J2.12@829.88,-254.94 ccw(c822.38,-245.79) 834.21,-245.79 ; J2.12@829.88,-254.94 ccw(c822.38,-245.79) 834.21,-245.79 ; 834.21,-245.79 ccw(c846.04,-245.79) J2.12@838.55,-254.94 ; 834.21,-245.79 ccw(c846.04,-245.79) J2.12@838.55,-254.94 ; 834.21,-245.79 ccw(c846.04,-245.79) J2.12@838.55,-254.94 ; 834.21,-245.79 ccw(c846.04,-245.79) J2.12@838.55,-254.94 ; U1.29@1014.88,429.51 cw(c1014.88,398.73) 1036.64,420.49 ; U1.29@1014.88,429.51 cw(c1014.88,398.73) 1036.64,420.49 ; U1.29@1014.88,429.51 cw(c1014.88,398.73) 1036.64,420.49 ; U1.29@1014.88,429.51 cw(c1014.88,398.73) 1036.64,420.49 ; U1.29@1014.88,435.51 cw(c1014.88,419.22) 1026.39,430.74 ; U1.29@1014.88,435.51 cw(c1014.88,419.22) 1026.39,430.74 ; U1.29@1014.88,435.51 cw(c1014.88,419.22) 1026.39,430.74 ; U1.29@1014.88,435.51 cw(c1014.88,419.22) 1026.39,430.74 ; U1.29@1021.62,442.26 ccw(c1037.91,442.26) 1026.39,430.74 ; U1.29@1021.62,442.26 ccw(c1037.91,442.26) 1026.39,430.74 ; U1.29@1021.62,442.26 ccw(c1037.91,442.26) 1026.39,430.74 ; U1.29@1021.62,442.26 ccw(c1037.91,442.26) 1026.39,430.74 ; U1.29@1027.62,442.26 ccw(c1058.4,442.26) 1036.64,420.49 ; U1.29@1027.62,442.26 ccw(c1058.4,442.26) 1036.64,420.49 ; U1.29@1027.62,442.26 ccw(c1058.4,442.26) 1036.64,420.49 ; U1.29@1027.62,442.26 ccw(c1058.4,442.26) 1036.64,420.49
XT2IN: C8.2 U1.11 Y1.2 | length 1373.8
  Top Layer w14: U1.11@307.21,280.79 397.96,371.54 v3(511.54,371.54) ; U1.11@322.52,304.85 ccw(c322.52,325.97) 337.46,311.04 ; U1.11@322.52,304.85 ccw(c322.52,325.97) 337.46,311.04 ; U1.11@322.52,304.85 ccw(c322.52,325.97) 337.46,311.04 ; U1.11@331.27,296.1 cw(c352.39,296.1) 337.46,311.04 ; U1.11@331.27,296.1 cw(c352.39,296.1) 337.46,311.04 ; U1.11@331.27,296.1 cw(c352.39,296.1) 337.46,311.04 ; 480.15,371.54 cw(c480.15,340.15) v3@502.34,362.34 ; 480.15,371.54 ccw(c480.15,402.92) v3@502.34,380.73 ; 480.15,371.54 cw(c480.15,340.15) v3@502.34,362.34 ; 480.15,371.54 ccw(c480.15,402.92) v3@502.34,380.73 ; 480.15,371.54 ccw(c480.15,402.92) v3@502.34,380.73 ; 480.15,371.54 cw(c480.15,340.15) v3@502.34,362.34
  Bottom Layer w14: v3(511.54,371.54) 540,371.54 ; Y1.2@540,292.72 540,371.54 ; C8.2@745,371.54 540,371.54 ; Y1.2@521.29,319.3 ccw(c476.11,364.48) 540,364.48 ; Y1.2@521.29,319.3 ccw(c476.11,364.48) 540,364.48 ; Y1.2@521.29,319.3 ccw(c476.11,364.48) 540,364.48 ; v3@521.36,363.02 cw(c540,346.88) 540,371.54 ; v3@521.36,363.02 cw(c540,346.88) 540,371.54 ; v3@521.36,363.02 cw(c540,346.88) 540,371.54 ; v3@521.36,380.05 ccw(c540,396.19) 540,371.54 ; v3@521.36,380.05 ccw(c540,396.19) 540,371.54 ; v3@521.36,380.05 ccw(c540,396.19) 540,371.54 ; 540,364.48 ccw(c603.89,364.48) Y1.2@558.71,319.3 ; 540,364.48 ccw(c603.89,364.48) Y1.2@558.71,319.3 ; 540,364.48 ccw(c603.89,364.48) Y1.2@558.71,319.3 ; 714.38,371.54 cw(c714.38,340.91) C8.2@736.03,362.57 ; 714.38,371.54 ccw(c714.38,402.16) C8.2@736.03,380.51 ; 714.38,371.54 cw(c714.38,340.91) C8.2@736.03,362.57 ; 714.38,371.54 ccw(c714.38,402.16) C8.2@736.03,380.51 ; 714.38,371.54 ccw(c714.38,402.16) C8.2@736.03,380.51 ; 714.38,371.54 cw(c714.38,340.91) C8.2@736.03,362.57
XT2OUT: C7.2 U1.10 Y1.1 | length 1817.1
  Top Layer w14: U1.10@271.86,316.15 339.25,383.54 385.71,430 v3(510,430) ; U1.10@287.17,340.21 ccw(c287.17,361.32) 302.1,346.39 ; U1.10@287.17,340.21 ccw(c287.17,361.32) 302.1,346.39 ; U1.10@287.17,340.21 ccw(c287.17,361.32) 302.1,346.39 ; U1.10@295.92,331.46 cw(c317.04,331.46) 302.1,346.39 ; U1.10@295.92,331.46 cw(c317.04,331.46) 302.1,346.39 ; U1.10@295.92,331.46 cw(c317.04,331.46) 302.1,346.39 ; 478.62,430 cw(c478.62,398.62) v3@500.81,420.81 ; 478.62,430 ccw(c478.62,461.38) v3@500.81,439.19 ; 478.62,430 cw(c478.62,398.62) v3@500.81,420.81 ; 478.62,430 ccw(c478.62,461.38) v3@500.81,439.19 ; 478.62,430 ccw(c478.62,461.38) v3@500.81,439.19 ; 478.62,430 cw(c478.62,398.62) v3@500.81,420.81
  Bottom Layer w6: C7.2@595,636.54 595,625 646.3,573.7 ; Y1.1@646.3,525 646.3,573.7 ; C7.2@595,617.88 cw(c595,600.7) 607.15,612.85 ; C7.2@595,617.88 cw(c595,600.7) 607.15,612.85 ; C7.2@595,617.88 cw(c595,600.7) 607.15,612.85 ; C7.2@599.68,634.57 ccw(c634.09,634.57) 609.76,610.24 ; C7.2@599.68,634.57 ccw(c634.09,634.57) 609.76,610.24 ; C7.2@599.68,634.57 ccw(c634.09,634.57) 609.76,610.24 ; C7.2@605.68,634.57 ccw(c654.58,634.57) 620.01,599.99 ; C7.2@605.68,634.57 ccw(c654.58,634.57) 620.01,599.99 ; C7.2@605.68,634.57 ccw(c654.58,634.57) 620.01,599.99 ; C7.2@611.68,634.57 ccw(c675.06,634.57) 630.25,589.75 ; C7.2@611.68,634.57 ccw(c675.06,634.57) 630.25,589.75 ; C7.2@611.68,634.57 ccw(c675.06,634.57) 630.25,589.75 ; Y1.1@637.63,562.08 ccw(c634.18,573.7) 646.3,573.7 ; Y1.1@637.63,562.08 ccw(c634.18,573.7) 646.3,573.7 ; Y1.1@637.63,562.08 ccw(c634.18,573.7) 646.3,573.7 ; 646.3,573.7 ccw(c658.42,573.7) Y1.1@654.97,562.08 ; 646.3,573.7 ccw(c658.42,573.7) Y1.1@654.97,562.08 ; 646.3,573.7 ccw(c658.42,573.7) Y1.1@654.97,562.08
  Bottom Layer w14: v3(510,430) 632.6,430 646.3,443.7 Y1.1@646.3,525 ; v3@519.19,420.81 cw(c541.38,398.62) 541.38,430 ; v3@519.19,420.81 cw(c541.38,398.62) 541.38,430 ; v3@519.19,420.81 cw(c541.38,398.62) 541.38,430 ; v3@519.19,439.19 ccw(c541.38,461.38) 541.38,430 ; v3@519.19,439.19 ccw(c541.38,461.38) 541.38,430 ; v3@519.19,439.19 ccw(c541.38,461.38) 541.38,430 ; Y1.1@627.59,498.41 cw(c582.41,453.23) 646.3,453.23 ; Y1.1@627.59,498.41 cw(c582.41,453.23) 646.3,453.23 ; Y1.1@627.59,498.41 cw(c582.41,453.23) 646.3,453.23 ; 646.3,453.23 cw(c710.19,453.23) Y1.1@665.01,498.41 ; 646.3,453.23 cw(c710.19,453.23) Y1.1@665.01,498.41 ; 646.3,453.23 cw(c710.19,453.23) Y1.1@665.01,498.41
pads on no net: E1. J2.1 J2.27 J2.28 J2.30 J2.32 J2.34 J2.59 P1.6 U1.63 U1.64 Y1.

## Polygon pours and split planes (outlines as drawn)
GND on Top Layer "Top Layer-No Net 1" (solid, pour order 1004): -86,84 100,84 100,-240 54.68,-241 54.68,-140 -86,-140
GND on Top Layer "Top Layer-No Net" (solid): 800,1030 910,920 840,850 730,960
GND on Top Layer "Top Layer-No Net 1" (solid, pour order 1000): 1220,510 1300,510 1300,390 1220,390
GND on Top Layer "Top Layer-No Net 1" (solid, pour order 1001): 590,-110 590,0 680,0 680,-110
GND on Top Layer "Top Layer-No Net 1" (solid, pour order 1002): -250,660 -140,660 -140,530 -250,530
GND on Top Layer "Top Layer-No Net 1" (solid, pour order 1003): 540,1500 540,1390 400,1390 400,1500
GND on GND (split plane): 750,1290 1339.9,700.1 1339.9,-127.93 1035,-127.93 1031.08,-128.32 1027.31,-129.46 1023.83,-131.32 1020.79,-133.82 1018.29,-136.87 1016.43,-140.34 1015.29,-144.11 1014.9,-148.03 1014.9,-368.05 1003.05,-379.9 70.88,-379.9 59.03,-368.05 59.03,-148.03 58.65,-144.11 57.5,-140.34 55.65,-136.87 53.15,-133.82 50.1,-131.32 46.63,-129.46 42.86,-128.32 38.94,-127.93 -279.9,-127.93 -279.9,1569.9 750,1569.9
VCC on VCC (split plane): 750,1290 1339.9,700.1 1339.9,-127.93 1035,-127.93 1031.08,-128.32 1027.31,-129.46 1023.83,-131.32 1020.79,-133.82 1018.29,-136.87 1016.43,-140.34 1015.29,-144.11 1014.9,-148.03 1014.9,-368.05 1003.05,-379.9 70.88,-379.9 59.03,-368.05 59.03,-148.03 58.65,-144.11 57.5,-140.34 55.65,-136.87 53.15,-133.82 50.1,-131.32 46.63,-129.46 42.86,-128.32 38.94,-127.93 -279.9,-127.93 -279.9,1569.9 750,1569.9

## Keep-outs
Keep-Out Layer:
  lines w10: 54.68,-140 -284,-140 -284,1570 1340,1570 1340,440 1340,100 1340,-120 1030,-120 1023.19,-126.81 1023.19,-140 ; -584,-584 1646,-584 1646,1686 -584,1686 -584,-584

## Other copper
VCC (plane layer: these items are gaps in the copper):
  region: 750,1580 750,1290 1360,680 1360,1580
GND (plane layer: these items are gaps in the copper):
  region: 750,1580 750,1290 1370,670 1370,1580

## Silkscreen, mask and mechanical layers (free items; w line width, h text height)
Top Overlay:
  lines w6: -40,1180 -50,1190 ; -40,1200 -50,1190 ; -50,1190 90,1190 ; 90,1190 280,1190 300,1190 300,1330 280,1330 180,1330 180,1280 90,1280 90,1190
  lines w10: 1046.71,-100.74 1083.06,-100.74 ; 1054.53,-107.04 1079.35,-107.04 ; 1067.49,-108.23 1067.49,-120 1044.32,-96.84 1085.73,-96.84 ; 1040,-90 1065,-130 1090,-90 1040,-90
  text "MINIPROG" at -240,1510 h60
  text "GND RX1 RST" at -250,1230 h45 r90
  text "NEpic" at 980,200 h80
  text "JTAG" at -20,190 h60 r90
  text "01-06-10" at 960.2,130 h60
  text "GND -" at 78,-50 h60
  text "VCC +" at 862,-60 h60
Mechanical 14:
  lines w10: 38.94,-148.03 -298.03,-148.03 -300,-146.06 -300,-140 -300,1590 1360,1590 1360,-148.03 1358.03,-148.03 1035,-148.03
Mechanical 15:
  lines w10: -584,116 -304,116 -304,416 -584,416 ; 1646,116 1356,116 1356,416 1646,416
Drill Drawing:
  text ".LEGEND" at 2116,-384 h60
  text "Drill Drawing." at 2116,-484 h60

## Dimensions
-584,-584 to 1646,-584 on Mechanical 1
-584,-584 to -584,1686 on Mechanical 1
1102,0 to 1100,-400 on Mechanical 1
0,0 to 0,1102 on Mechanical 1
0,1102 to 1102,1102 on Mechanical 1
-300,1590 to 1360,1590 on Mechanical 1
-298.03,-148.03 to -300,1590 on Mechanical 1
38.94,-148.03 to 20,-400 on Mechanical 1